# Altium PCB PCB.PcbDoc (part 1 of 2)
Units mm, origin at the board's own origin, x right, y up, seen from the top; angles counter-clockwise.
Board outline 125 x 105 mm, 2 copper layers (Top Layer, Bottom Layer), stack 1.571 mm thick; 113 components, 99 nets, 408 pads, 143 vias.
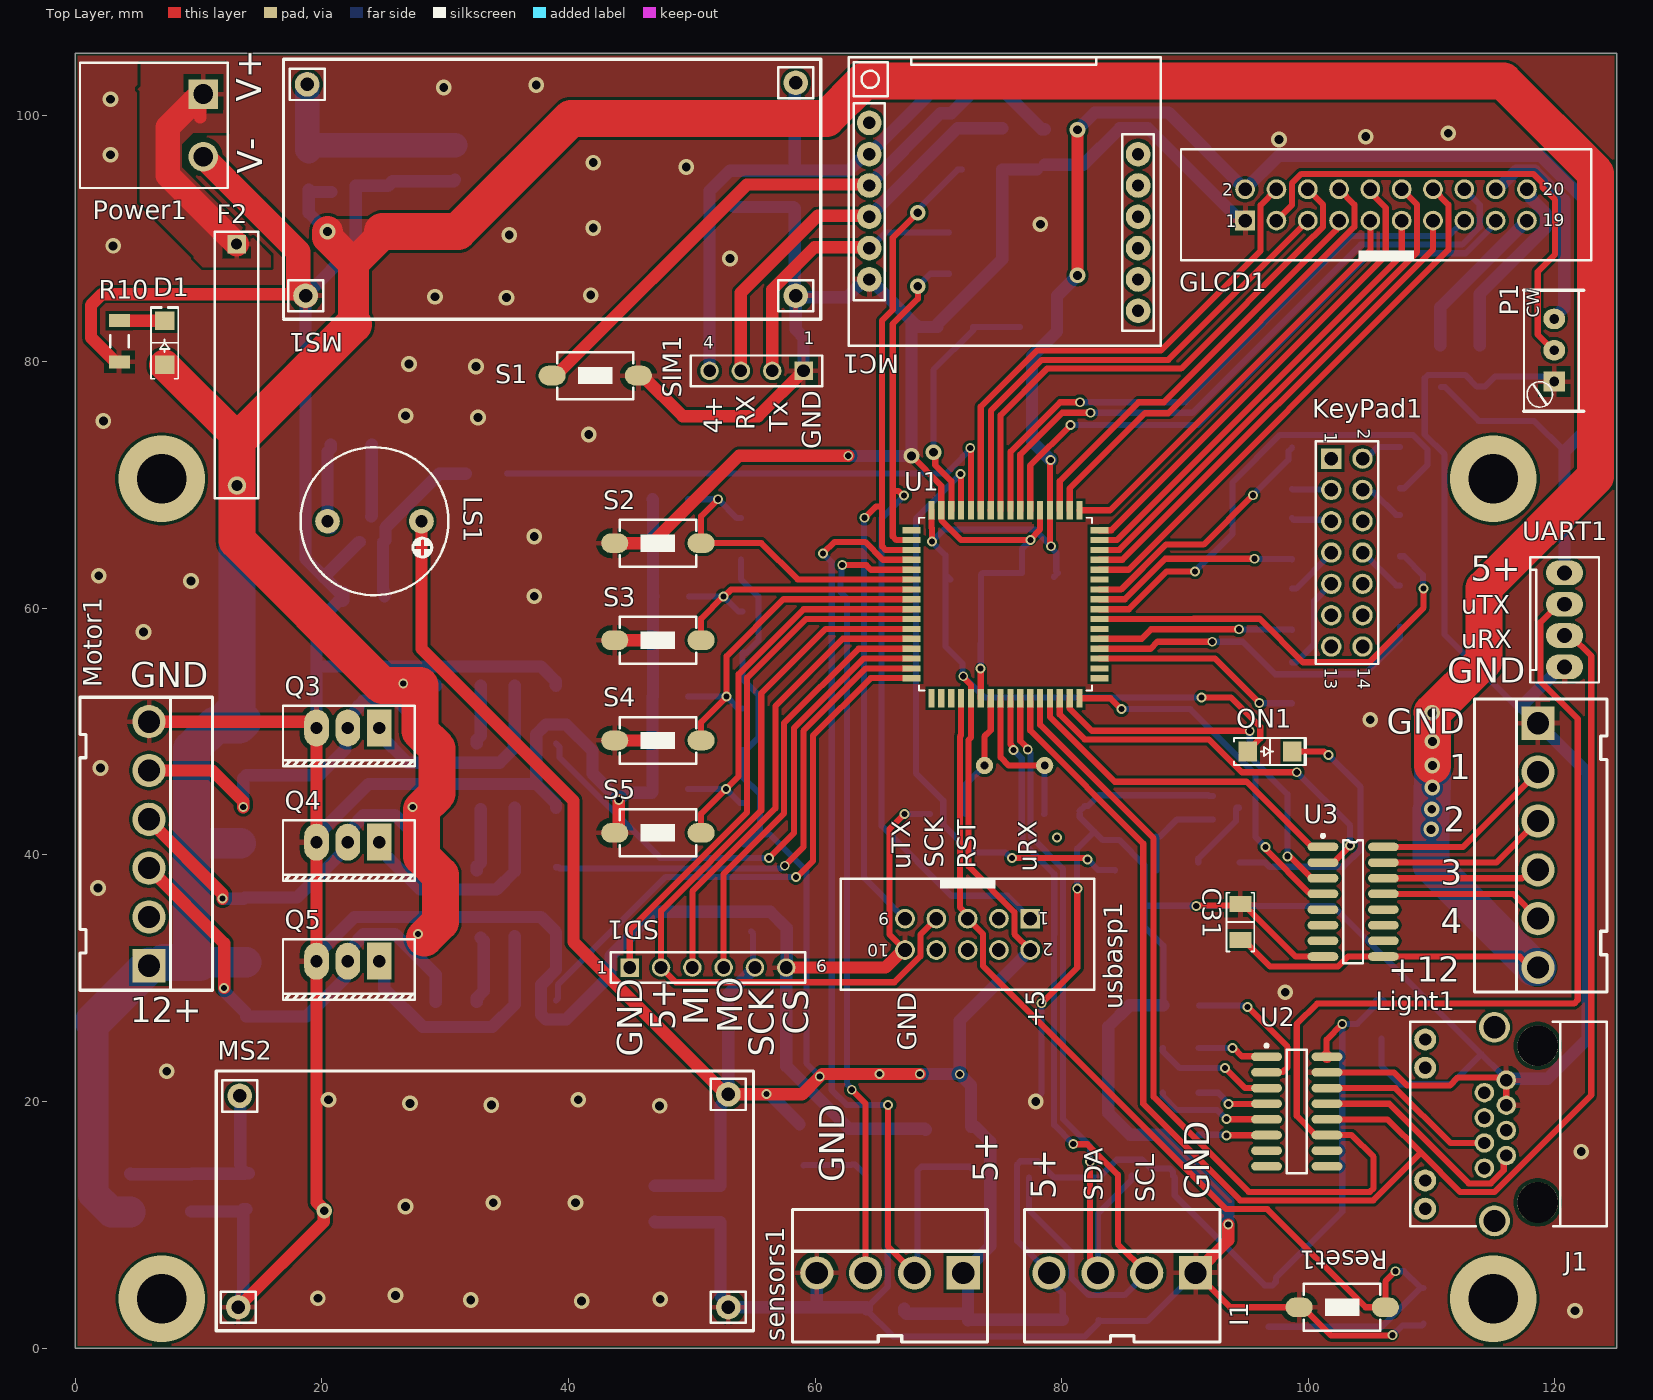
[diagram p0: Top Layer view]
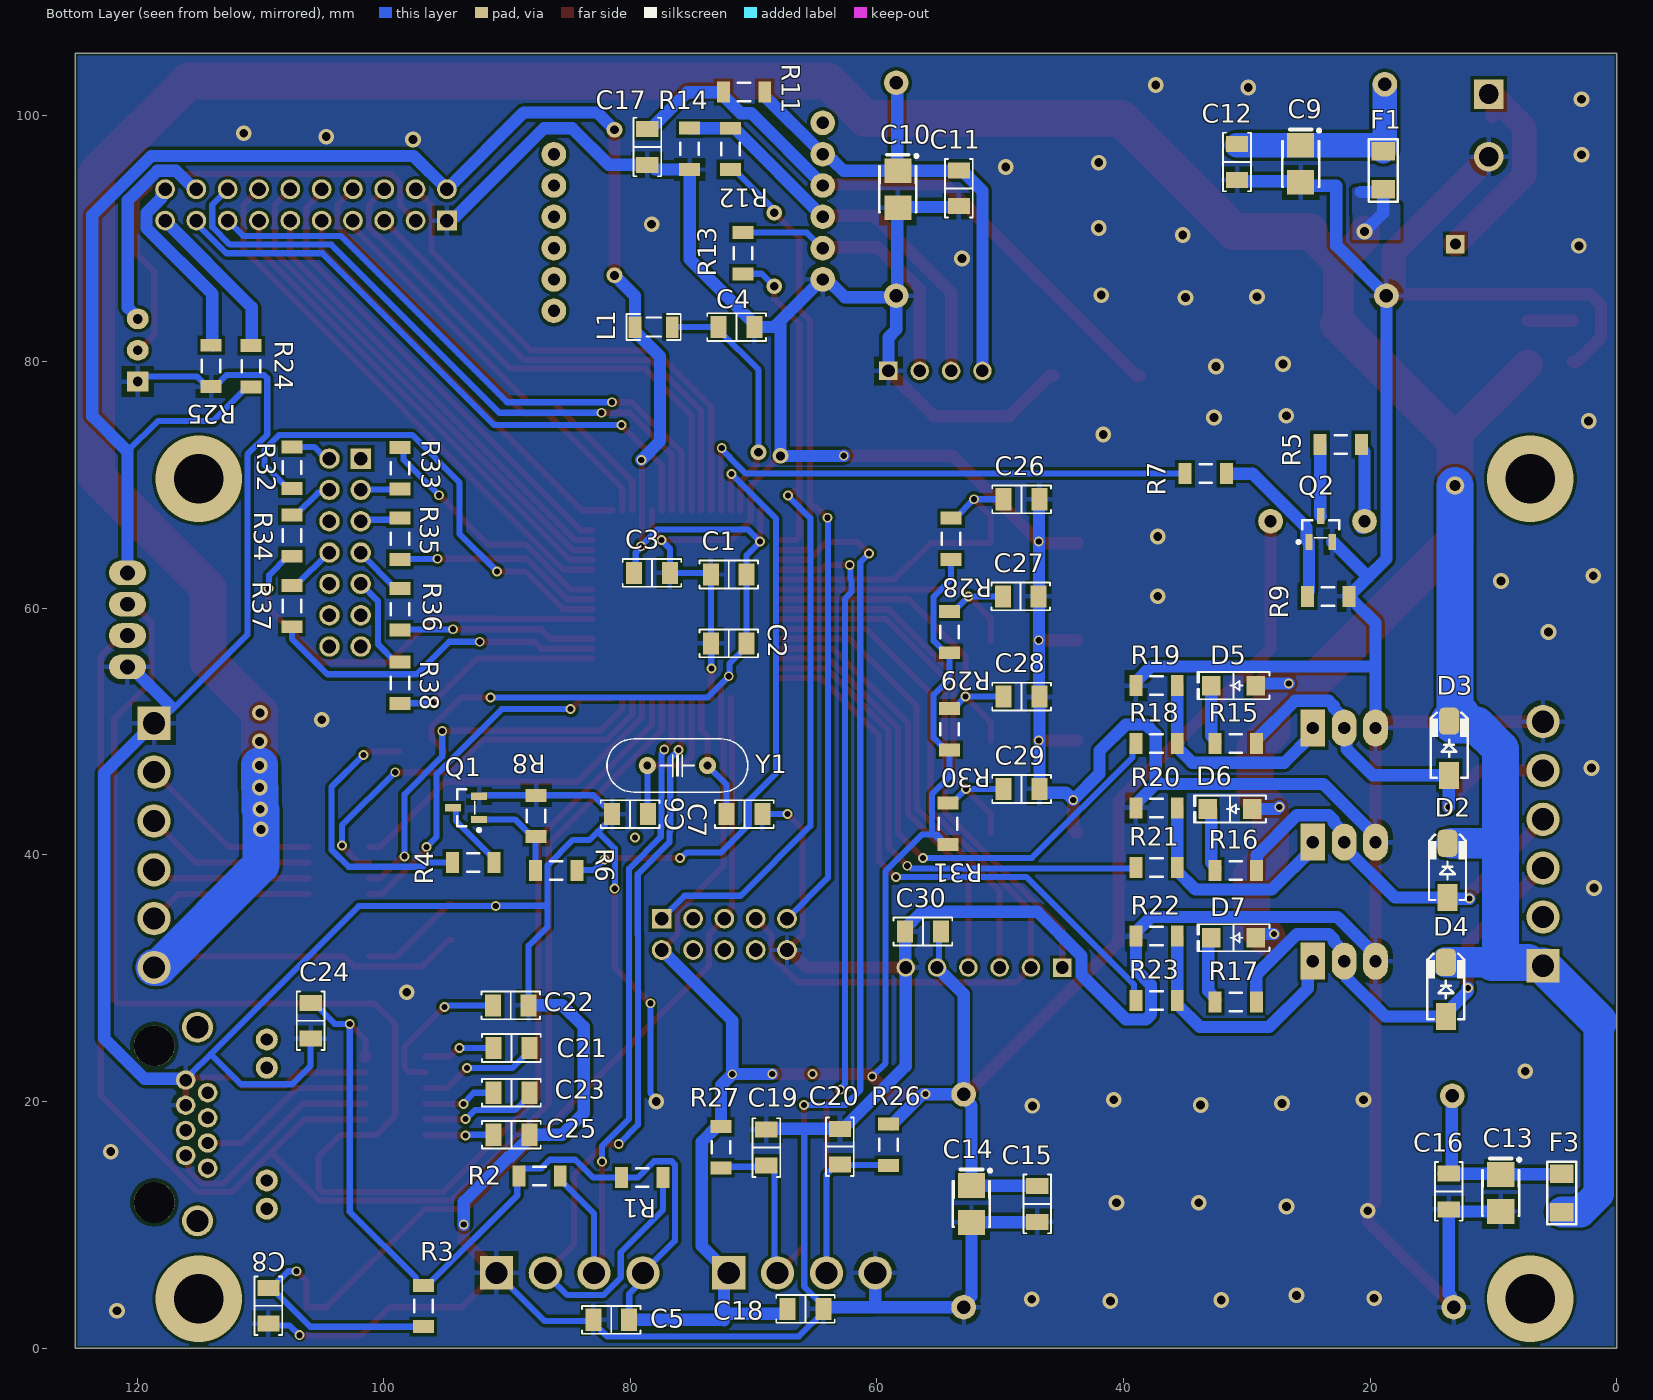
[diagram p1: Bottom Layer view, seen from below]

## Layer stack, top to bottom
Top Solder: solder mask 0.0102, Solder Resist, Dk 3.5
Top Layer: signal copper 0.0356
Dielectric 1: dielectric 1.5, FR-4, Dk 4.8
Bottom Layer: signal copper 0.0356
Bottom Solder: solder mask 0.0102, Solder Resist, Dk 3.5

## Board outline
0,0 125,0 125,105 0,105

## Design rules (kind name [scope] priority, off if disabled: settings)
AcuteAngle [All] p1: minimum=6.00000000000000E+0001 checktracksonly=TRUE
AssemblyTestPointUsage [All] p1 off:
AssemblyTestpoint [All] p1 off: testpointundercomponent=TRUE minsize=1.016 maxsize=2.54 preferedsize=1.524 minholesize=0 maxholesize=1.016 preferedholesize=0.813 testpointgrid=0.025 usegrid=TRUE gridtolerance=0 allowsidetop=TRUE allowsidebottom=TRUE
BoardOutlineClearance [All] p1: gap=0.2 ignorepadtopadclearanceinfootprint=FALSE
Clearance Poly_Clearance [All vs InPolygon] p1: gap=0.25 ignorepadtopadclearanceinfootprint=TRUE except(0.3: Arc-Hole Track-Hole SMDPad-Hole THPad-Hole Via-Hole Fill-Hole Poly-Hole Region-Hole Text-Hole)
Clearance [All] p2: gap=0.2 ignorepadtopadclearanceinfootprint=FALSE except(0.3: Arc-Hole Track-Hole SMDPad-Hole THPad-Hole Via-Hole Fill-Hole Poly-Hole Region-Hole Text-Hole)
FabricationTestPointUsage [All] p1 off: valid=0 allowmultiple=FALSE
FabricationTestpoint [All] p1 off: side=3 testpointundercomponent=TRUE minsize=1.016 maxsize=2.54 preferedsize=1.524 minholesize=0 maxholesize=1.016 preferedholesize=0.813 testpointgrid=0.025 allowsidetop=TRUE allowsidebottom=TRUE usegrid=TRUE gridtolerance=0
HoleSize [All] p1: absolutevalues=TRUE maxlimit=10 minlimit=0.4 maxpercent=80.000 minpercent=20.000
HoleToHoleClearance [All] p1: gap=0.3 allowstackedmicrovias=TRUE
MinimumAnnularRing [All] p1: minimumring=0.15
MinimumSolderMaskSliver [All] p1: minsoldermaskwidth=0.01
PolygonConnect [All] p1: thpad.connectstyle=Relief thpad.reliefconductorwidth=0.4 thpad.reliefentries=4 thpad.polygonreliefangle="90 Angle" thpad.airgapwidth=0.4 smdpad.connectstyle=Relief smdpad.reliefconductorwidth=0.4 smdpad.reliefentries=4 smdpad.polygonreliefangle="90 Angle" smdpad.airgapwidth=0.4 via.connectstyle=Direct via.reliefconductorwidth=0.254 via.reliefentries=4 via.polygonreliefangle="90 Angle" via.airgapwidth=0.254
RoutingVias [All] p1: holewidth=0.4 width=0.7 viastyle="Through Hole" minholewidth=0.4 minwidth=0.7 maxholewidth=3 maxwidth=6
SilkToSilkClearance [All] p1: silktosilkclearance=0
SilkToSolderMaskClearance [IsPad] p1: minsilkscreentomaskgap=0.01 clearancetoexposedcopper=TRUE
SolderMaskExpansion [All] p1: expansion=0.102 istentingtop=FALSE
Width [All] p1: maxlimit=10 minlimit=0.2 preferedwidth=0.3
21 further rules are at their usual default settings.

## Classes and differential pairs
component class U_SDcard: C30 SD1
component class U_POS: C21 C22 C23 C24 C25 J1 U2
component class U_Lighting: C31 Light1 U3
component class U_GSM: C17 MC1 R11 R12 R13 R14 S1 SIM1
component class U_Sensor: C18 C19 C20 R26 R27 sensors1
component class U_KeyPad: KeyPad1 R32 R33 R34 R35 R36 R37 R38
component class U_Motor: D2 D3 D4 D5 D6 D7 Motor1 Q3 Q4 Q5 R15 R16 R17 R18 R19 R20 R21 R22 R23
component class U_Switch: C26 C27 C28 C29 R28 R29 R30 R31 S2 S3 S4 S5
component class U_GLCD: GLCD1 P1 R24 R25
component class U_Controller: C1 C2 C3 C4 C5 C6 C7 C8 I1 L1 LS1 ON1 Q1 Q2 R1 R2 R3 R4 R5 R6 R7 R8 R9 Reset1 U1 UART1 usbasp1 Y1

## Components (designator, comment, footprint, x,y, rotation, side; value= is the part's Value field where it differs from the comment)
C1 "" "CAP 1206/3216" 72.009,62.738 r0 bottom
C2 "" "CAP 1206/3216" 72.009,57.15 r0 bottom
C3 "100n" "CAP 1206/3216" 78.232,62.865 r180 bottom
C4 "100n" "CAP 1206/3216" 71.374,82.804 r180 bottom
C5 "100n" "CAP 1206/3216" 81.534,2.286 r0 bottom
C6 "22p" "CAP 1206/3216" 80.01,43.307 r0 bottom
C7 "22p" "CAP 1206/3216" 70.739,43.307 r180 bottom
C8 "100n" "CAP 1206/3216" 109.347,3.429 r270 bottom
C9 "10u" SMT_C_Tantalum_B 25.629,96.036 r270 bottom
C10 "10u" SMT_C_Tantalum_B 58.293,93.98 r270 bottom
C11 "100n" "CAP 1206/3216" 53.34,94.054 r270 bottom
C12 "100n" "CAP 1206/3216" 30.785,96.19 r270 bottom
C13 "10u" SMT_C_Tantalum_B 9.398,12.573 r270 bottom
C14 "10u" SMT_C_Tantalum_B 52.324,11.684 r270 bottom
C15 "100n" "CAP 1206/3216" 46.99,11.684 r270 bottom
C16 "100n" "CAP 1206/3216" 13.614,12.7 r270 bottom
C17 "100n" "CAP 1206/3216" 78.613,97.409 r270 bottom
C18 "100n" "CAP 1206/3216" 65.786,3.175 r180 bottom
C19 "2n" "CAP 1206/3216" 68.961,16.256 r90 bottom
C20 "2n" "CAP 1206/3216" 62.992,16.33 r90 bottom
C21 "1u'F, 50'V" "CAP 1206/3216" 89.637,24.333 r180 bottom
C22 "1u'F, 50'V" "CAP 1206/3216" 89.687,27.788 r180 bottom
C23 "1u'F, 50'V" "CAP 1206/3216" 89.637,20.701 r180 bottom
C24 "1u'F, 50'V" "CAP 1206/3216" 105.918,26.543 r270 bottom
C25 "1u'F, 50'V" "CAP 1206/3216" 89.637,17.297 r180 bottom
C26 "100n" "CAP 1206/3216" 48.26,68.834 r180 bottom
C27 "100n" "CAP 1206/3216" 48.334,60.96 r180 bottom
C28 "100n" "CAP 1206/3216" 48.26,52.832 r180 bottom
C29 "100n" "CAP 1206/3216" 48.26,45.339 r180 bottom
C30 "1u'F, 50'V" "CAP 1206/3216" 56.261,33.782 r180 bottom
C31 "1u'F, 50'V" "CAP 1206/3216" 94.488,34.544 r270 top
D1 "Yellow, 1206" "LED 1206/3216 YELLOW" 7.239,81.534 r90 top
D2 "1N5819" 430X270D 13.716,38.735 r90 bottom
D3 "1N5819" 430X270D 13.589,48.641 r90 bottom
D4 "1N5819" 430X270D 13.843,29.083 r90 bottom
D5 "Yellow, 1206" "LED 1206/3216 YELLOW" 31.084,53.721 r0 bottom
D6 "Yellow, 1206" "LED 1206/3216 YELLOW" 31.369,43.713 r0 bottom
D7 "Yellow, 1206" "LED 1206/3216 YELLOW" 31.084,33.274 r0 bottom
F1 "2A" 1206_F 18.923,95.513 r90 bottom
F2 "180'C, 10'A" PIN-W2/E2.8 13.106,79.146 r270 top
F3 "2A" 1206_F 4.445,12.573 r90 bottom
GLCD1 "10x2" BOX-HDR-10X2-2.54mm-S 106.299,92.71 r0 top
I1 "4'Pin" 645004114822 84.911,6.096 r0 top
J1 "RJ45, mini" RJ45_MINI 118.594,18.159 r90 top
KeyPad1 "7x2" HDR_THT_7x2M_2.54mm 103.124,64.516 r270 top
L1 "100nH" IND1206 78.105,82.804 r180 bottom
Light1 "6'Pin" 645006114822 118.618,40.767 r90 top
LS1 "5V" BZ_SJ 24.257,67.056 r180 top
MC1 "Sim800L" Sim800L_Module 75.289,91.745 r0 top
Motor1 "6'Pin" 645006114822 5.969,40.9 r270 top
MS1 "LM2596" LM2596_modsen 38.354,93.599 r0 top
MS2 "LM2596" LM2596_modsen 32.893,11.557 r0 top
ON1 "Value?" "LED 1206/3216 GREEN" 96.901,48.387 r0 top
P1 "10K" "Multi turn 01" 119.939,78.384 r180 top
Power1 "2'Pin" Phoenix_2PIN_RA_P5.08mm 6.375,99.162 r270 top
Q1 "NPN" SOT23_N 93.311,43.815 r0 bottom
Q2 "NPN" SOT23_N 24.003,66.421 r90 bottom
Q3 "NPN" "TO-220 AB" 22.098,50.292 r180 top
Q4 "NPN" "TO-220 AB" 22.098,41.021 r180 top
Q5 "NPN" "TO-220 AB" 22.098,31.369 r180 top
R1 "Value?" "RES 1206 (3216X08L)" 77.724,13.843 r0 bottom value=4.7K
R2 "Value?" "RES 1206 (3216X08L)" 86.054,13.97 r0 bottom value=4.7K
R3 "4.7K" "RES 1206 (3216X08L)" 96.774,2.107 r90 bottom value=10K
R4 "47K" "RES 1206 (3216X08L)" 91.44,39.37 r0 bottom value=Value?
R5 "Value?" "RES 1206 (3216X08L)" 21.082,73.279 r0 bottom
R6 "Value?" "RES 1206 (3216X08L)" 87.301,38.735 r180 bottom value=4.7K
R7 "4.7K" "RES 1206 (3216X08L)" 32.029,70.917 r0 bottom
R8 "4.7K" "RES 1206 (3216X08L)" 87.63,44.45 r270 bottom value=47K
R9 "47K" "RES 1206 (3216X08L)" 22.098,60.96 r0 bottom
R10 "1.8K" "RES 1206 (3216X08L)" 3.567,80.35 r90 top
R11 "10K" "RES 1206 (3216X08L)" 72.061,101.854 r180 bottom
R12 "47K" "RES 1206 (3216X08L)" 71.882,98.552 r270 bottom
R13 "1K" "RES 1206 (3216X08L)" 70.866,90.095 r270 bottom value=1.2K
R14 "5.6K" "RES 1206 (3216X08L)" 75.184,95.96 r90 bottom
R15 "1.8K" "RES 1206 (3216X08L)" 29.591,49.022 r0 bottom
R16 "1.8K" "RES 1206 (3216X08L)" 29.591,38.735 r0 bottom
R17 "1.8K" "RES 1206 (3216X08L)" 29.591,28.067 r0 bottom
R18 "4.7K" "RES 1206 (3216X08L)" 36.012,49.022 r0 bottom
R19 "47K" "RES 1206 (3216X08L)" 38.608,53.721 r180 bottom
R20 "47K" "RES 1206 (3216X08L)" 38.608,43.815 r180 bottom
R21 "4.7K" "RES 1206 (3216X08L)" 36.012,38.989 r0 bottom
R22 "47K" "RES 1206 (3216X08L)" 38.608,33.401 r180 bottom
R23 "4.7K" "RES 1206 (3216X08L)" 36.012,28.194 r0 bottom
R24 "0" "RES 1206 (3216X08L)" 110.744,80.924 r270 bottom
R25 "0" "RES 1206 (3216X08L)" 113.995,80.951 r270 bottom
R26 "10K" "RES 1206 (3216X08L)" 59.055,17.78 r270 bottom
R27 "10K" "RES 1206 (3216X08L)" 72.644,14.986 r90 bottom
R28 "10K" "RES 1206 (3216X08L)" 53.975,66.929 r270 bottom
R29 "10K" "RES 1206 (3216X08L)" 54.102,59.361 r270 bottom
R30 "10K" "RES 1206 (3216X08L)" 54.102,51.487 r270 bottom
R31 "10K" "RES 1206 (3216X08L)" 54.229,43.815 r270 bottom
R32 "100" "RES 1206 (3216X08L)" 107.442,70.104 r90 bottom
R33 "100" "RES 1206 (3216X08L)" 98.679,70.052 r90 bottom
R34 "Value" "RES 1206 (3216X08L)" 107.442,64.591 r90 bottom
R35 "Value" "RES 1206 (3216X08L)" 98.679,66.929 r270 bottom
R36 "Value" "RES 1206 (3216X08L)" 98.679,61.214 r270 bottom
R37 "Value" "RES 1206 (3216X08L)" 107.442,58.876 r90 bottom
R38 "Value" "RES 1206 (3216X08L)" 98.679,55.245 r270 bottom
Reset1 "PB" SW_PB_SMD_2PIN_SPST_6X3X2 102.743,3.302 r0 top
S1 "PB" SW_PB_SMD_2PIN_SPST_6X3X2 42.164,78.867 r0 top
S2 "PB" SW_PB_SMD_2PIN_SPST_6X3X2 47.244,65.278 r0 top
S3 "PB" SW_PB_SMD_2PIN_SPST_6X3X2 47.244,57.404 r0 top
S4 "PB" SW_PB_SMD_2PIN_SPST_6X3X2 47.244,49.276 r0 top
S5 "PB" SW_PB_SMD_2PIN_SPST_6X3X2 47.244,41.783 r0 top
SD1 "6" HDR_THT_6F_2.54mm 51.308,30.861 r0 top
sensors1 "4'Pin" 645004114822 66.069,6.096 r0 top
SIM1 "4" HDR_THT_4F_2.54mm 55.245,79.248 r180 top
U1 "ATMEGA64A-AU" QFP80P1600X1600X120-64N 75.438,60.325 r0 top
U2 "MAX3232" NSO16_M 99.06,19.177 r0 top
U3 "ULN2003" SO16_M 103.632,36.195 r0 top
UART1 "UART" "MOLEX KK 0022272041" 120.777,59.055 r270 top
usbasp1 "5x2" BOX-HDR-5X2-2.54mm-S 72.365,33.553 r180 top
Y1 "8M" "XTAL Small" 76.173,47.244 r0 bottom

## Footprints (in the part's own frame and the unit in brackets; to place one, negate y for a bottom-side part, rotate by r counter-clockwise, add the part's x,y. Pads: shape width x height; smd on the part's side, far side on the other; paste and mask are expansions set on the pad)
430X270D [mm] "SMA Molded Diode, 2-Leads, Body 4.3x2.7mm"
  rect 2.2x1.6 smd: 1(-2.2,0)
  rrect50% 2.2x1.6 smd: 2(2.2,0)
  silkscreen extent -2.4,-1.5 2.9,1.5, body extent -2.75,-1.4 2.75,1.4, height 2.6
1206_F [mm] "Surface mount FUSE 1206"
  rect 1.5x1.9 smd: 1(-1.55,0) 2(1.55,0)
  silkscreen extent -2.54,-1.18 2.54,1.18, body extent -1.6,-0.83 1.6,0.83, height 0.56
645004114822 [mm] "3.96mm Male Locking Header, 4p"
  rect 2.7x2.7 hole 1.8: 1(5.94,0)
  round 2.7 hole 1.8: 2(1.98,0) 3(-1.98,0) 4(-5.94,0)
  silkscreen extent -7.92,-5.6 7.92,5.15, body extent -7.98,-5.6 7.98,5.15, height 13.95
645006114822 [mm] "3.96mm Male Locking Header, 6p"
  rect 2.7x2.7 hole 1.8: 1(9.9,0)
  round 2.7 hole 1.8: 2(5.94,0) 3(1.98,0) 4(-1.98,0) 5(-5.94,0) 6(-9.9,0)
  silkscreen extent -11.88,-5.6 11.88,5.15, body extent -11.93,-5.6 11.93,5.15, height 13.95
BOX-HDR-5X2-2.54mm-S [mm] "10 pins, straight, gold plating"
  rect 1.6x1.6 hole 1.1: 1(-5.08,-1.27)
  round 1.6 hole 1.1: 2(-5.08,1.27) 3(-2.54,-1.27) 4(-2.54,1.27) 5(0,-1.27) 6(0,1.27) 7(2.54,-1.27) 8(2.54,1.27) 9(5.08,-1.27) 10(5.08,1.27)
  silkscreen extent -10.28,-4.5 10.28,4.5, body extent -10.18,-4.42 10.18,4.75, height 9.13
BOX-HDR-10X2-2.54mm-S [mm] "20 pins, straight, gold plating"
  rect 1.6x1.6 hole 1.1: 1(-11.43,-1.27)
  round 1.6 hole 1.1: 2(-11.43,1.27) 3(-8.89,-1.27) 4(-8.89,1.27) 5(-6.35,-1.27) 6(-6.35,1.27) 7(-3.81,-1.27) 8(-3.81,1.27) 9(-1.27,-1.27) 10(-1.27,1.27) 11(1.27,-1.27) 12(1.27,1.27) 13(3.81,-1.27) 14(3.81,1.27) 15(6.35,-1.27) 16(6.35,1.27) 17(8.89,-1.27) 18(8.89,1.27) 19(11.43,-1.27) 20(11.43,1.27)
  silkscreen extent -16.63,-4.5 16.63,4.5, body extent -16.53,-4.42 16.53,4.75, height 9.13
BZ_SJ [mm] "Buzzer From Old SJ Library"
  round 2 hole 1: 1(-3.81,0) 2(3.81,0)
  silkscreen extent -6,-6 6,6, body extent -5.82,-6 6.17,5.99, height 9.5
"CAP 1206/3216" [mm] "Chip Capacitor, 2-Leads, Body 3.25x1.60mm, IPC Medium Density"
  rect 1.3x1.8 smd: 1(-1.45,0) 2(1.45,0)
  silkscreen extent -2.37,-1.12 2.37,1.12, body extent -1.6,-0.81 1.6,0.81, height 1.62
HDR_THT_4F_2.54mm [mm] "Socket Header, Pitch 2.54 mm, THT, Vertical, single row, 4p"
  rect 1.5x1.5 hole 1.02: 1(-3.81,0)
  round 1.5 hole 1.02: 2(-1.27,0) 3(1.27,0) 4(3.81,0)
  silkscreen extent -5.33,-1.25 5.33,1.25, body extent -5.33,-1.25 5.33,1.25, height 8.55
HDR_THT_6F_2.54mm [mm] "Socket Header, Pitch 2.54 mm, THT, Vertical, single row, 6p"
  rect 1.5x1.5 hole 1.02: 1(-6.35,0)
  round 1.5 hole 1.02: 2(-3.81,0) 3(-1.27,0) 4(1.27,0) 5(3.81,0) 6(6.35,0)
  silkscreen extent -7.87,-1.25 7.87,1.25, body extent -7.87,-1.25 7.87,1.25, height 8.55
HDR_THT_7x2M_2.54mm [mm] "Pin Header, pitch 2.54 mm, THT, Vertical, dual row, 14p"
  rect 1.65x1.65 hole 1.1: 1(-7.62,-1.27)
  round 1.65 hole 1.1: 2(-7.62,1.27) 3(-5.08,-1.27) 4(-5.08,1.27) 5(-2.54,-1.27) 6(-2.54,1.27) 7(0,-1.27) 8(0,1.27) 9(2.54,-1.27) 10(2.54,1.27) 11(5.08,-1.27) 12(5.08,1.27) 13(7.62,-1.27) 14(7.62,1.27)
  silkscreen extent -9.04,-2.54 9.04,2.54, body extent -8.89,-2.54 8.89,2.54, height 8.59
IND1206 [mm] "Chip Inductor, 2-Leads, Body 3/20x1/60mm, IPC Medium Density DESIGNER:ABBAS BASEREH"
  rect 1.04x1.74 smd: 1(-1.51,0) 2(1.51,0)
  silkscreen extent -2.2,-1.05 2.2,1.05, body extent -1.65,-0.85 1.65,0.85, height 0.94
"LED 1206/3216 GREEN" [mm] "Chip Diode, 2-Leads, Body 3.13x1.55mm, IPC Medium Density"
  rect 1.5x1.6 smd: 1(-1.8,0) 2(1.8,0)
  silkscreen extent -2.92,-1.1 2.92,1.1, body extent -1.6,-0.8 1.6,0.8, height 0.9
"LED 1206/3216 YELLOW" [mm] "Chip Diode, 2-Leads, Body 3.13x1.55mm, IPC Medium Density"
  rect 1.5x1.6 smd: 1(-1.8,0) 2(1.8,0)
  silkscreen extent -2.92,-1.1 2.92,1.1, body extent -1.6,-0.8 1.6,0.8, height 0.9
LM2596_modsen [mm]
  round 2 hole 1.1: 1(-19.558,8.89) 2(-19.685,-8.255) 3(20.066,-8.255) 4(20.066,9.017)
  silkscreen extent -21.46,-10.16 22.1,10.92, body extent -21.5,-10.12 22,10.88, height 16.91
"MOLEX KK 0022272041" [mm]
  oval 2x3 hole 1.2: 1(-3.81,0) 2(-1.27,0) 3(1.27,0) 4(3.81,0)
  silkscreen extent -5.08,-2.79 5.08,2.79, body extent -5.08,-2.9 5.08,2.9, height 11.7
"Multi turn 01" [mil] "Stand Multi Turn - Turning CW Increase P1~2 Resistor"
  rect 70x65 hole 31.5: 1(0,0)
  oval 70x65 hole 31.5: 2(0,-100) 3(0,-200)
  silkscreen extent -94,-291 96,94, body extent -74,-282 92,92, height 452
NSO16_M [mm]
  oval 2.5x0.7 smd: 1(-2.45,4.445) 2(-2.45,3.175) 3(-2.45,1.905) 4(-2.45,0.635) 5(-2.45,-0.635) 6(-2.45,-1.905) 7(-2.45,-3.175) 8(-2.45,-4.445) 9(2.45,-4.445) 10(2.45,-3.175) 11(2.45,-1.905) 12(2.45,-0.635) 13(2.45,0.635) 14(2.45,1.905) 15(2.45,3.175) 16(2.45,4.445)
  silkscreen extent -2.57,-5 0.8,5.47, body extent -3.1,-5.08 3.1,5.08, height 1.73
Phoenix_2PIN_RA_P5.08mm [mm] "Phoenix 2 Pin; Pitch 5.08mm; Body 1016X1200"
  rect 2.4x2.4 hole 1.6: 1(-2.54,4)
  round 2.4 hole 1.6: 2(2.54,4)
  silkscreen extent -5.08,-6 5.08,6, body extent -5.08,-6 5.08,6, height 8.55
PIN-W2/E2.8 [mm] "Thru-Hole; 2 Leads"
  rect 1.5x1.5 hole 0.9: 1(-10.389,-0.025)
  round 1.5 hole 0.9: 2(9.195,0)
  silkscreen extent -11.4,-1.8 10.21,1.73, body extent -11.24,-1.7 10.08,1.6, height 2.57
QFP80P1600X1600X120-64N [mil]
  rect 58x20 smd: 1(-300,236) 2(-300,205) 3(-300,173) 4(-300,142) 5(-300,110) 6(-300,79) 7(-300,47) 8(-300,16) 9(-300,-16) 10(-300,-47) 11(-300,-79) 12(-300,-110) 13(-300,-142) 14(-300,-173) 15(-300,-205) 16(-300,-236) 33(300,-236) 34(300,-205) 35(300,-173) 36(300,-142) 37(300,-110) 38(300,-79) 39(300,-47) 40(300,-16) 41(300,16) 42(300,47) 43(300,79) 44(300,110) 45(300,142) 46(300,173) 47(300,205) 48(300,236)
  rect 20x58 smd: 17(-236,-300) 18(-205,-300) 19(-173,-300) 20(-142,-300) 21(-110,-300) 22(-79,-300) 23(-47,-300) 24(-16,-300) 25(16,-300) 26(47,-300) 27(79,-300) 28(110,-300) 29(142,-300) 30(173,-300) 31(205,-300) 32(236,-300) 49(236,300) 50(205,300) 51(173,300) 52(142,300) 53(110,300) 54(79,300) 55(47,300) 56(16,300) 57(-16,300) 58(-47,300) 59(-79,300) 60(-110,300) 61(-142,300) 62(-173,300) 63(-205,300) 64(-236,300)
  silkscreen extent -276,-276 276,276, body extent -315,-315 315,315, height 47
"RES 1206 (3216X08L)" [mm]
  rect 1.05x1.7 smd: 1(-0.377,0) 2(2.973,0)
  silkscreen extent 0.8,-0.75 1.8,0.75, body extent -0.23,-0.76 2.82,0.76, height 0.6
RJ45_MINI [mm] "RJ45 MiniWith LED"
  round 1.575 hole 1: 1(3.57,2.54) 2(2.55,4.32) 3(1.53,2.54) 4(0.51,4.32) 5(-0.51,2.54) 6(-1.53,4.32) 7(-2.55,2.54) 8(-3.57,4.32)
  round 2.5 hole 1.8: 9(-7.85,3.5) 10(7.85,3.5)
  round 3.3 hole 3.3 unplated: 11(-6.35,0) 12(6.35,0)
  round 1.778 hole 1: 13(6.86,9.12) 14(4.57,9.12) 15(-4.57,9.12) 16(-6.86,9.12)
  silkscreen extent -8.3,-5.59 8.3,10.34, body extent -8.35,-5.99 8.36,10.26, height 14.75
Sim800L_Module [mm] "GSM/GPRS Module 25x23/6mm"
  round 2 hole 1: 1(-10.9,7.62) 2(-10.9,5.08) 3(-10.9,2.54) 4(-10.9,0) 5(-10.9,-2.54) 6(-10.9,-5.08) 7(10.9,-7.62) 8(10.9,-5.08) 9(10.9,-2.54) 10(10.9,0) 11(10.9,2.54) 12(10.9,5.08)
  silkscreen extent -12.55,-10.45 12.73,12.95, body extent -12.55,-10.45 12.73,12.95, height 15.49
SMT_C_Tantalum_B [mm] "Capacitor, SM Tantalum; Body 3.5 x 2.8 mm (LxW typ)"
  rect 2x2.2 smd: 1(-1.5,0) 2(1.5,0)
  silkscreen extent -2.82,-1.5 1.85,1.62, body extent -1.75,-1.4 1.75,1.4, height 1.9
SO16_M [mm]
  oval 2.5x0.7 smd: 1(-2.45,4.445) 2(-2.45,3.175) 3(-2.45,1.905) 4(-2.45,0.635) 5(-2.45,-0.635) 6(-2.45,-1.905) 7(-2.45,-3.175) 8(-2.45,-4.445) 9(2.45,-4.445) 10(2.45,-3.175) 11(2.45,-1.905) 12(2.45,-0.635) 13(2.45,0.635) 14(2.45,1.905) 15(2.45,3.175) 16(2.45,4.445)
  silkscreen extent -2.57,-5 0.8,5.47, body extent -3,-4.97 3,4.96, height 1.62
SOT23_N [mm] "SOT23, 3-Leads, Body 2.9x1.3mm, Pitch 0.95mm, Lead Span 2.3mm, IPC Medium Density"
  rect 1.3x0.6 smd: 1(-1.05,0.95) 2(-1.05,-0.95) 3(1.05,0)
  silkscreen extent -1.17,-1.5 0.7,1.92, body extent -1.27,-1.5 1.27,1.5, height 1.1
SW_PB_SMD_2PIN_SPST_6X3X2 [mm] "SWITCH, PUSHBUTTON, SMD, SPST, 6X3.5X2.5mm, RS-282G05A3, SKQYPA, 50000 Cycles"
  oval 2.2x1.6 smd mask+0.1: 1(-3.5,0) 2(3.5,0)
  silkscreen extent -3.1,-1.9 3.1,1.9, body extent -3.4,-1.86 3.4,1.86, height 2.5
"TO-220 AB" [mm] "TO-220AB, Thru-Hole, Vertical, Heatsink Mounted; 3 In-Line Leads; Pitch 2.54 mm"
  rect 2x3 hole 1: 1(-2.54,0)
  oval 2x3 hole 1: 2(0,0) 3(2.54,0)
  silkscreen extent -5.44,-1.78 5.26,3.12, body extent -5.37,-1.66 5.28,3.14, height 19.5
"XTAL Small" [mil]
  round 55 hole 25: 1(-96.06,0) 2(96.06,0)
  silkscreen extent -225,-85 225,85, body extent -226,-89 226,89, height 140

## Part data
C1 C2 C3 C4 C5 C6 C7 C8 C11 C12 C15 C16 C17 C18 C19 C20 C26 C27 C28 C29: library part Cap_Multi_SMD_100nF_1206, "Bipolar ceramic capacitor SMD", Package=1206, Rating=50V, Inflow=inflow?, Type=MultiLayer, Validation=Valid
C9 C13: library part Cap_Tantalum, "Tantalum Capacitor,TAJ Series-SMD", Package=Package?, Rating=25v, Inflow=inflow?, Type=Tantalum, Validation=Valid
C10 C14: library part Cap_Tantalum, "Tantalum Capacitor,TAJ Series-SMD", Package=Package?, Rating=6.3v, Inflow=inflow?, Type=Tantalum, Validation=Valid
C21 C22 C23 C24 C25 C30 C31: library part Cap_Multi_1u_50_1206, "Bipolar ceramic capacitor SMD", Package=Package?, Rating=Rating?, Inflow=5237, Type=Type?, Validation=Valid
D1 D5 D6 D7: library part Semi_LED_Yellow_1206, "LED", Package=Package?, Rating=Rating?, Inflow=5250, Type=Type?, Validation=Valid
D2 D3 D4: library part Semi_Diod_Sch_1N5819_SMD, "Schottky Rectifiers", Package=SMA, Rating=Rating?, Inflow=inflow?, Type=Schottky, Validation=Valid
F1 F3: library part Other_Elec_Fuse_SMD, "Short circiut  protection", Package=1206, Rating=Rating?, Inflow=inflow?, Type=Fast, Validation=Valid
F2: library part Other_Elec_Fuse_Thermal, "Thermal Fuse", Package=Package?, Rating=Rating?, Inflow=8222, Type=Type?, Validation=NT
GLCD1: library part Con_IDC_10x2, "Male Box Header, 20 pins", Package=Package?, Rating=Rating?, Inflow=7134, Type=Type?, Validation=NT
I1 sensors1: library part Con_Power_4_PC_V, "4'Pin Power Connector", Package=Package?, Rating=Rating?, Inflow=6223, Type=Type?, Validation=Valid
J1: library part Con_PC_RJ45_MINI, "RJ45 Mini With two LEDs", Package=Package?, Rating=Rating?, Inflow=inflow?, Type=Type?, Validation=NT
KeyPad1: library part Con_MPH_7x2_V_THT_2.54, "Header, dual row, 14 pin", Package=Package?, Rating=Rating?, Inflow=7152, Type=Type?, Validation=NT
L1: library part Ind_SMD_1206, "Inductor", Package=1206, Rating=Rating?, Inflow=inflow?, Type=SMD, Validation=Valid
Light1 Motor1: library part Con_Power_6_PC_V, "6'Pin Power Connector", Package=Package?, Rating=Rating?, Inflow=6235, Type=Type?, Validation=Valid
LS1: library part Other_Elec_Buzzer, "Magnetic Transducer Buzzer", Package=Dip, Rating=12mm, Inflow=2212, Type=Buzzer, Validation=Valid
MC1: library part ModSen_Com_Sim800L, "SimCom GSM/GPRS Module", Package=Dip, Rating=Rating?, Inflow=5327, Type=GSM-GPRS, Validation=NT
MS1 MS2: library part ModSen_LM2596, "DC to DC Buck converter 1.23V-30V 3A", Package=Package?, Rating=Rating?, Inflow=5325, Type=Type?, Validation=Valid
ON1: library part Semi_LED_SMD, "LED", Package=Package?, Rating=Rating?, Inflow=inflow?, Type=LED, Validation=Valid
P1: library part Res_Multi, "Multi Turn", Package=Package?, Rating=Rating?, Inflow=inflow?, Type=Type?, Validation=Valid
Power1: library part Con_Power_2, "Power Connector 2'Pin", Package=Package?, Rating=Rating?, Inflow=inflow?, Type=Type?, Validation=NT
Q1 Q2: library part Semi_BJT_BC817, "NPN General purpose Transistor", Package=Package?, Rating=Rating?, Inflow=inflow?, Type=Type?, Validation=Valid
Q3 Q4 Q5: library part Semi_BJT_TIP41C, "NPN Power transistor", Package=Package?, Rating=Rating?, Inflow=4206, Type=Type?, Validation=NT
R1 R2: library part Res_SMD_0805, "Resistor", Package=0805, Rating=0.125W, Inflow=inflow?, Type=10%, Validation=Valid
R3 R4 R5 R6 R7 R8 R9 R10 R11 R12 R13 R14 R15 R16 R17 R18 R19 R20 R21 R22 R23 R24 R25 R26 R27 R28 R29 R30 R31 R32 R33 R34 R35 R36 R37 R38: library part Res_SMD_1206, "Resistor", Package=1206, Rating=0.25W, Inflow=inflow?, Type=10%, Validation=Valid
Reset1 S1 S2 S3 S4 S5: library part SW_PushButton_2_SMD, "SMT Tactile ‎Switch", Package=SMD, Rating=2b, Inflow=8260, Type=Vertical, Validation=Valid
SD1: library part Con_FPH_6x1_V_THT_2.54, "Header, single row, 6 pin", Package=Package?, Rating=Rating?, Inflow=8101, Type=Type?, Validation=NT
SIM1: library part Con_FPH_4x1_V_THT_2.54, "Header, single row, 4 pin", Package=Package?, Rating=Rating?, Inflow=8101, Type=Type?, Validation=NT
U1: "AVR AVRÂ® ATmega Microcontroller IC 8-Bit 16MHz 64KB (32K x 16) FLASH 64-TQFP (14x14)", Package="TQFP-64 Microchip", Check_prices=https://www.snapeda.com/parts/ATMEGA64A-AU/Microchip/view-part/?ref=eda, MF=Microchip, MP=ATMEGA64A-AU, SnapEDA_Link=https://www.snapeda.com/parts/ATMEGA64A-AU/Microchip/view-part/?ref=snap
U2: library part IC_Converter_MAX3232CSE, "RS-232 Interface IC 3.0V to 5.5V, Low-Power, up to 1Mbps, True RS-232 Transceivers Using Four 0.1uF External Capacitors", Package=SOIC-16, Rating=Rating?, Inflow=inflow?, Type=RS232, Validation=Valid
U3: library part IC_Driver_ULN2003, "Seven darlington array drivers", Package=SO-16, Rating=Rating?, Inflow=1506, Type=Driver, Validation=Valid
UART1: library part Con_UART, "UART Connector", Package=Package?, Rating=Rating?, Inflow=4528, Type=Type?, Validation=Valid
usbasp1: library part Con_IDC_5x2, "Male Box Header, 10 pins", Package=Package?, Rating=Rating?, Inflow=7119, Type=Type?, Validation=NT
Y1: library part Other_Elec_Xtal_THT, "Crystal Oscillator", Package=Dip, Rating=Rating?, Inflow=inflow?, Type=Quartz, Validation=Valid

## Via types
v1: diameter 0.8, hole 0.5, Top Layer to Bottom Layer, 76 vias
v2: diameter 1.27, hole 0.711, Top Layer to Bottom Layer, 63 vias
v3: diameter 7, hole 4, Top Layer to Bottom Layer, 4 vias

## Nets (pads, with @x,y where several pads share a name; then routed paths per layer and width w, separated by ;. In a path a pad name is that pad's centre, name@x,y a point inside that pad or via, vN(x,y) a via of type N, cw(c..) or ccw(c..) an arc to the next point about the centre after c; other vN are vias at no path point)
+4: C10.1 C11.1 MC1.2 MS1.4 R11.2 SIM1.4 | length 42.9
  Bottom Layer w1: SIM1.4@51.435,79.248 51.435,93.849 53.09,95.504 C11.1@53.34,95.504 53.352,95.492 58.281,95.492 C10.1@58.293,95.48 ; MS1.4@58.42,102.616 58.356,102.553 58.356,95.544 C10.1@58.293,95.48 ; MC1.2@64.389,96.825 64.118,96.825 63.618,96.325 63.543,96.325 62.698,95.48 C10.1@58.293,95.48 ; MC1.2@64.456,96.896 69.063,101.503 69.063,101.829 R11.2@69.088,101.854
+5: C1.1 C2.1 C3.1 C5.1 C14.1 C15.1 C18.1 C24.1 C30.2 GLCD1.2 I1.4 L1.1 LS1.1 MS2.4 ON1.1 R1.2 R2.2 R3.2 R24.2 R26.1 R27.2 R28.2 R29.2 R30.2 R31.2 SD1.5 sensors1.1 U1.21 U1.52 U1.64 U2.16 UART1.1 usbasp1.2 | length 489.3
  Top Layer w0.5: U1.64@69.444,67.945 69.444,66.523 69.465,66.501 69.465,65.544 69.469,65.54 v1(69.469,65.405) ; v1(72.009,54.483) 72.009,54.402 72.64,53.771 72.64,52.709 U1.21@72.644,52.705 72.644,49.523 72.441,49.32 72.441,39.055 76.155,35.341 76.155,33.573 usbasp1.2@77.445,32.283 ; v1(79.1,72.03) 79.049,71.979 79.049,67.949 U1.52@79.045,67.945 79.045,65.181 79.121,65.105 v1(79.121,65.024) ; v1(91.338,52.756) 93.734,52.756 96.1,50.39 96.1,49.436 95.101,48.437 ON1.1@95.101,48.387 ; U2.16@101.473,23.659 101.473,25.019 v1(102.743,26.289)
  Top Layer w1: LS1.1@28.067,67.056 28.067,56.716 40.394,44.389 40.394,32.935 52.755,20.574 MS2.4@52.959,20.574 58.928,20.574 v1(60.376,22.022) 60.579,22.225 v1(65.227,22.225) v1(68.478,22.225) ; v2(81.28,86.995) v2(81.28,98.806) ; U2.16@101.473,23.659 U2.16@101.51,23.622
  Bottom Layer w0.5: R28.2@53.975,63.956 53.975,62.367 55.402,60.94 55.402,57.363 54.427,56.388 R29.2@54.102,56.388 54.102,54.283 55.402,52.983 55.402,49.489 54.427,48.514 R30.2@54.102,48.514 54.102,46.33 55.529,44.903 55.529,41.817 55.205,41.494 54.554,40.842 R31.2@54.229,40.842 ; R31.2@54.391,41.005 54.716,41.005 54.829,41.117 54.829,41.363 55.122,41.656 56.32,41.656 59.284,38.692 59.284,23.114 v1(60.376,22.022) ; C30.2@54.811,33.782 54.964,33.629 54.964,31.014 SD1.5@55.118,30.861 ; C1.1@70.959,62.338 C1.1@70.559,62.738 ; C3.1@79.375,62.558 C3.1@79.682,62.865 79.549,62.998 79.549,64.515 79.121,64.943 v1(79.121,65.024) 79.121,65.083 77.822,66.382 70.446,66.382 v1(69.469,65.405) 70.559,64.315 C1.1@70.559,62.738 ; C5.1@80.084,2.286 80.084,4.388 78.971,5.501 I1.4@78.971,6.096 76.372,8.695 76.372,14.879 76.636,15.143 78.058,15.143 79.358,13.843 R1.2@80.697,13.843 83.027,13.843 84.454,15.27 86.509,15.27 87.209,14.57 88.752,14.57 89.027,14.295 R2.2@89.027,13.97 89.159,13.838 89.159,12.37 96.449,5.08 R3.2@96.774,5.08 97.099,5.08 97.374,5.355 97.374,5.68 102.743,11.049 v1(102.743,26.289) 103.964,26.289 C24.1@105.668,27.993 ; v1(91.338,52.756) 73.736,52.756 v1(72.009,54.483) 71.952,54.54 71.952,55.507 70.559,56.9 C2.1@70.559,57.15 C1.1@70.559,62.738 ; R24.2@110.744,77.951 111.069,77.951 113.823,75.198 118.298,75.198 120.777,72.719
  Bottom Layer w1: C15.1@46.99,13.134 47.015,13.159 52.299,13.159 C14.1@52.324,13.184 52.324,19.668 52.959,20.303 MS2.4@52.959,20.574 ; SD1.5@55.118,30.861 52.959,28.702 MS2.4@52.959,20.574 ; v1@56.058,20.574 MS2.4@52.959,20.574 ; v1(56.058,20.599) 56.288,20.599 R26.1@58.73,18.157 ; C18.1@67.236,3.175 67.236,2.925 67.386,2.775 72.39,2.775 ; v1(68.478,22.225) 71.704,22.225 72.644,21.285 R27.2@72.644,17.959 72.969,17.959 74.194,16.734 74.194,8.281 sensors1.1@72.009,6.096 72.39,5.715 72.39,2.775 ; v1(71.73,22.2) 71.73,26.568 usbasp1.2@77.445,32.283 ; 72.39,2.235 72.39,2.775 ; 72.39,2.286 C5.1@80.084,2.286 ; v1(79.1,72.03) 77.59,73.54 77.59,80.429 79.615,82.454 L1.1@79.615,82.804 79.615,85.33 v2(81.28,86.995) ; v2(81.28,98.806) 82.677,100.203 88.646,100.203 GLCD1.2@94.869,93.98 97.569,96.68 118.847,96.68 123.636,91.891 123.636,75.578 120.777,72.719 UART1.1@120.777,62.865 ; C24.1@105.668,27.993 C24.1@105.918,27.993
+12: C31.2 D1.1 D2.2 D3.2 D4.2 D5.1 D6.1 D7.1 F1.1 F2.2 F3.1 Light1.6 Motor1.1 U3.9 | length 379
  Top Layer w0.5: C31.2@94.488,33.094 94.738,33.094 96.882,30.95 102.413,30.95 103.213,31.75 U3.9@106.082,31.75 117.14,31.75 118.023,30.867 Light1.6@118.618,30.867
  Top Layer w2.5: D1.1@7.239,79.734 13.257,73.716 ; v2(20.447,90.551) 20.447,90.068 22.555,87.96 ; 22.555,83.014 22.555,87.96 ; 24.917,90.551 24.917,90.322 22.555,87.96 ; v2(110.033,51.511) v2@110.045,51.524 ; 123.3,70.697 123.3,70.764
  Top Layer w3: 22.555,83.014 13.106,73.565 F2.2@13.106,69.952 13.106,65.507 24.892,53.721 27.94,53.721 27.94,50.044 29.343,48.641 29.343,44.964 28.067,43.688 28.067,39.884 29.597,38.354 29.597,34.55 28.321,33.274 ; 24.917,90.551 31.013,90.551 40.183,99.72 60.926,99.72 63.949,102.743 115.824,102.743 123.3,95.267 123.3,70.764 ; v2@110.045,51.524 114.249,55.728 114.249,61.646 123.3,70.697 ; v2(110.058,47.244) v2(110.058,49.2) v2@110.058,51.511
  Bottom Layer w1: v2(20.447,90.551) 18.923,92.075 F1.1@18.923,93.963 19.135,93.751 20.752,93.751 ; v1(26.594,53.899) 29.106,53.899 D5.1@29.284,53.721 ; v1(27.356,43.891) 27.534,43.713 D6.1@29.569,43.713 ; v1(27.788,33.579) 27.792,33.574 29.034,33.574 29.284,33.324 D7.1@29.284,33.274
  Bottom Layer w2.5: 1.45,26.481 1.45,12.487 2.914,11.023 F3.1@4.445,11.023 ; Motor1.1@5.969,31 6.069,31.1 7.001,31.1 Motor1.1@7.184,31.283 ; 9.423,31.919 10.06,31.283 D4.2@13.843,31.283 ; 10.373,40.935 D2.2@13.416,40.935 ; 12.41,51.571 D3.2@12.859,51.571
  Bottom Layer w3: 1.45,26.481 Motor1.1@5.969,31 ; Motor1.1@7.184,31.283 10.06,31.283 ; 9.423,31.919 9.423,48.585 11.38,50.541 13.289,50.541 D3.2@13.589,50.841 ; 13.106,52.027 F2.2@13.106,69.952 ; v2(110.058,47.244) v2(110.058,45.466) 110.007,45.415 v2(110.007,43.688) 109.957,43.637 v2(109.957,42.062) 109.957,39.175 118.265,30.867 Light1.6@118.618,30.867
Aref: C4.1 L1.2 U1.62 | length 20.6
  Top Layer w0.5: v2(69.596,72.644) 69.743,72.497 69.743,71.608 71.044,70.307 U1.62@71.044,67.945
  Bottom Layer w0.5: v2(69.596,72.644) 69.596,79.326 72.824,82.554 C4.1@72.824,82.804 L1.2@76.595,82.804
BLA: GLCD1.19 R24.1 | length 13
  Bottom Layer w1: R24.1@110.693,81.326 110.693,84.404 GLCD1.19@117.729,91.44
BLB: GLCD1.20 R25.1 | length 15.5
  Bottom Layer w1: R25.1@113.894,81.303 113.894,85.483 119.229,90.819 119.229,92.061 118.029,93.261 118.029,93.518 117.729,93.818 GLCD1.20@117.729,93.98
Buzzer: R7.2 U1.60 | length 43.6
  Top Layer w0.5: v1(72.581,72.992) 72.581,72.911 72.644,72.848 U1.60@72.644,67.945
  Bottom Layer w0.5: R7.2@35.002,70.917 70.614,70.917 71.95,72.253 71.95,72.279 72.581,72.911 v1(72.581,72.992)
CS: SD1.1 U1.10 | length 42.8
  Top Layer w0.5: SD1.1@44.958,30.861 44.958,33.929 54.483,43.454 54.483,54.356 59.258,59.131 U1.10@67.818,59.131
CS1: GLCD1.16 U1.55 | length 53
  Top Layer w0.5: U1.55@76.632,67.945 76.632,72.456 80.034,75.858 v1(82.321,75.858)
  Bottom Layer w0.5: v1(82.321,75.858) 90.615,75.858 104.247,89.49 112.467,89.49 113.899,90.922 113.899,92.73 GLCD1.16@112.649,93.98
CS2: GLCD1.15 U1.56 | length 49.3
  Top Layer w0.5: U1.56@75.844,67.945 75.844,72.695 79.858,76.708 v1(81.483,76.708)
  Bottom Layer w0.5: v1(81.483,76.708) 89.992,76.708 103.474,90.19 111.399,90.19 GLCD1.15@112.649,91.44
D/I: GLCD1.4 U1.59 | length 41.9
  Top Layer w0.5: U1.59@73.431,67.945 73.431,76.352 77.978,80.899 88.036,80.899 96.119,88.982 96.119,92.69 GLCD1.4@97.409,93.98
DB0: GLCD1.7 U1.51 | length 34.1
  Top Layer w0.5: U1.51@79.832,67.945 79.836,67.949 79.836,70.311 86.233,76.708 88.29,76.708 102.279,90.696 102.279,91.23 GLCD1.7@102.489,91.44
DB1: GLCD1.8 U1.50 | length 37.2
  Top Layer w0.5: U1.50@80.645,67.945 80.645,69.723 86.741,75.819 88.636,75.819 103.739,90.922 103.739,92.73 GLCD1.8@102.489,93.98
DB2: GLCD1.9 U1.49 | length 34.7
  Top Layer w0.5: U1.49@81.432,67.945 83.922,67.945 105.029,89.052 GLCD1.9@105.029,91.44
DB3: GLCD1.10 U1.48 | length 38.4
  Top Layer w0.5: U1.48@83.058,66.319 83.062,66.323 84.026,66.323 106.279,88.577 106.279,92.473 105.029,93.723 GLCD1.10@105.029,93.98
DB4: GLCD1.11 U1.47 | length 36.9
  Top Layer w0.5: U1.47@83.058,65.532 83.062,65.536 84.485,65.536 107.569,88.62 GLCD1.11@107.569,91.44
DB5: GLCD1.12 U1.46 | length 41.4
  Top Layer w0.5: U1.46@83.058,64.719 83.062,64.723 84.662,64.723 108.819,88.88 108.819,92.73 GLCD1.12@107.569,93.98
DB6: GLCD1.13 U1.45 | length 39.8
  Top Layer w0.5: U1.45@83.058,63.932 83.062,63.936 84.917,63.936 110.109,89.128 GLCD1.13@110.109,91.44
DB7: GLCD1.14 U1.44 | length 44.5
  Top Layer w0.5: U1.44@83.058,63.119 85.42,63.119 111.359,89.058 111.359,92.73 GLCD1.14@110.109,93.98
E: GLCD1.6 U1.57 | length 43.8
  Top Layer w0.5: U1.57@75.032,67.945 75.032,75.667 78.802,79.437 89.68,79.437 100.433,90.19 100.467,90.19 101.199,90.922 101.199,91.958 101.199,92.73 GLCD1.6@99.949,93.98